# Altium PCB Driverkort.PcbDoc
Units mm, origin at the board's own origin, x right, y up, seen from the top; angles counter-clockwise.
Board outline 48 x 48 mm, 2 copper layers (Top Layer, Bottom Layer); 38 components, 61 nets, 157 pads, 27 vias.
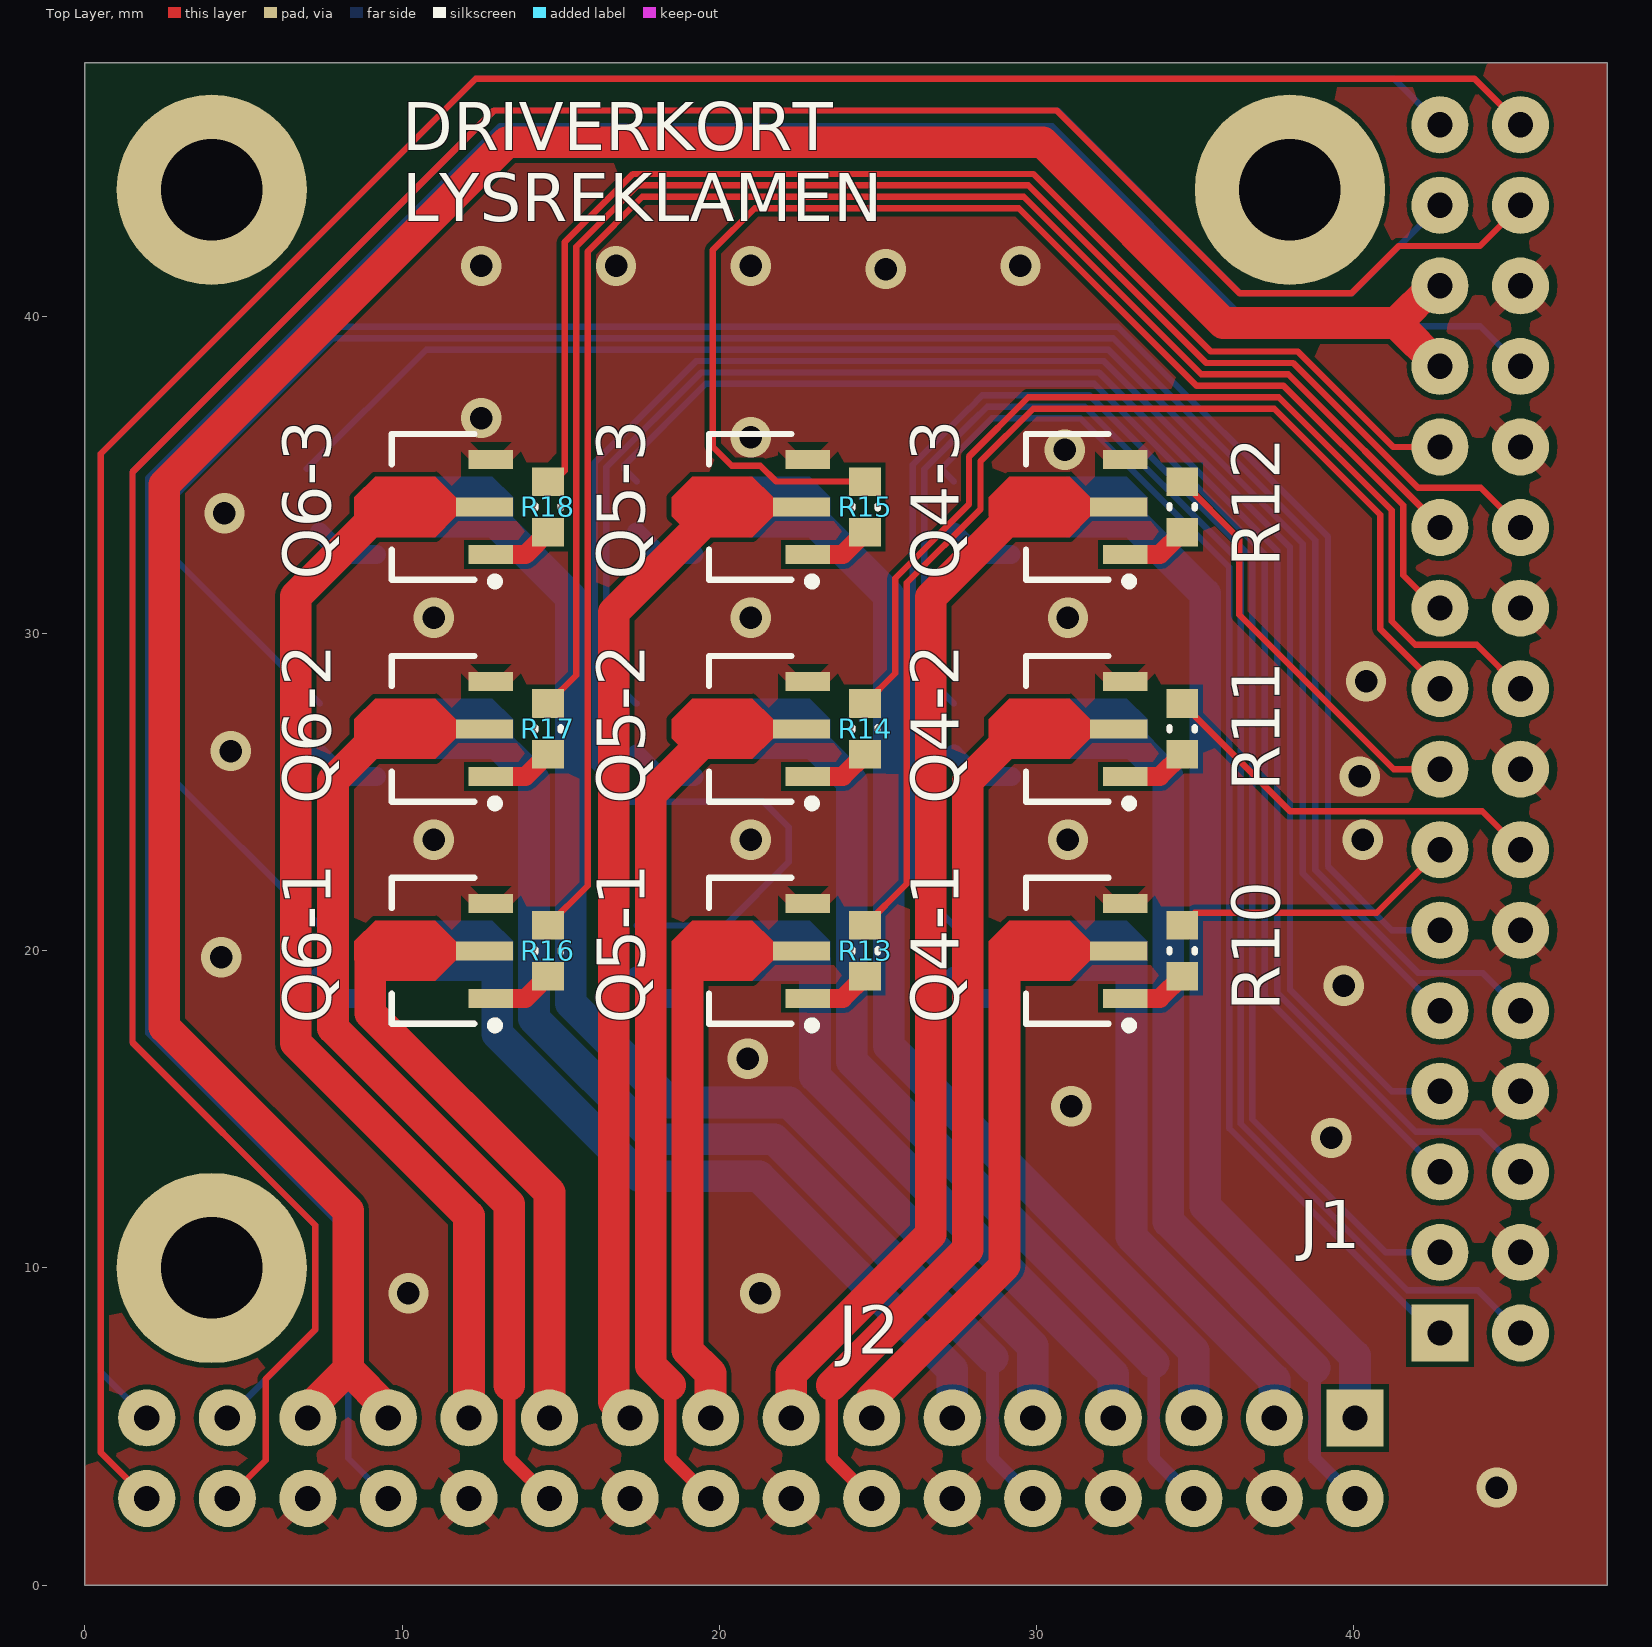
[diagram p0: Top Layer view]
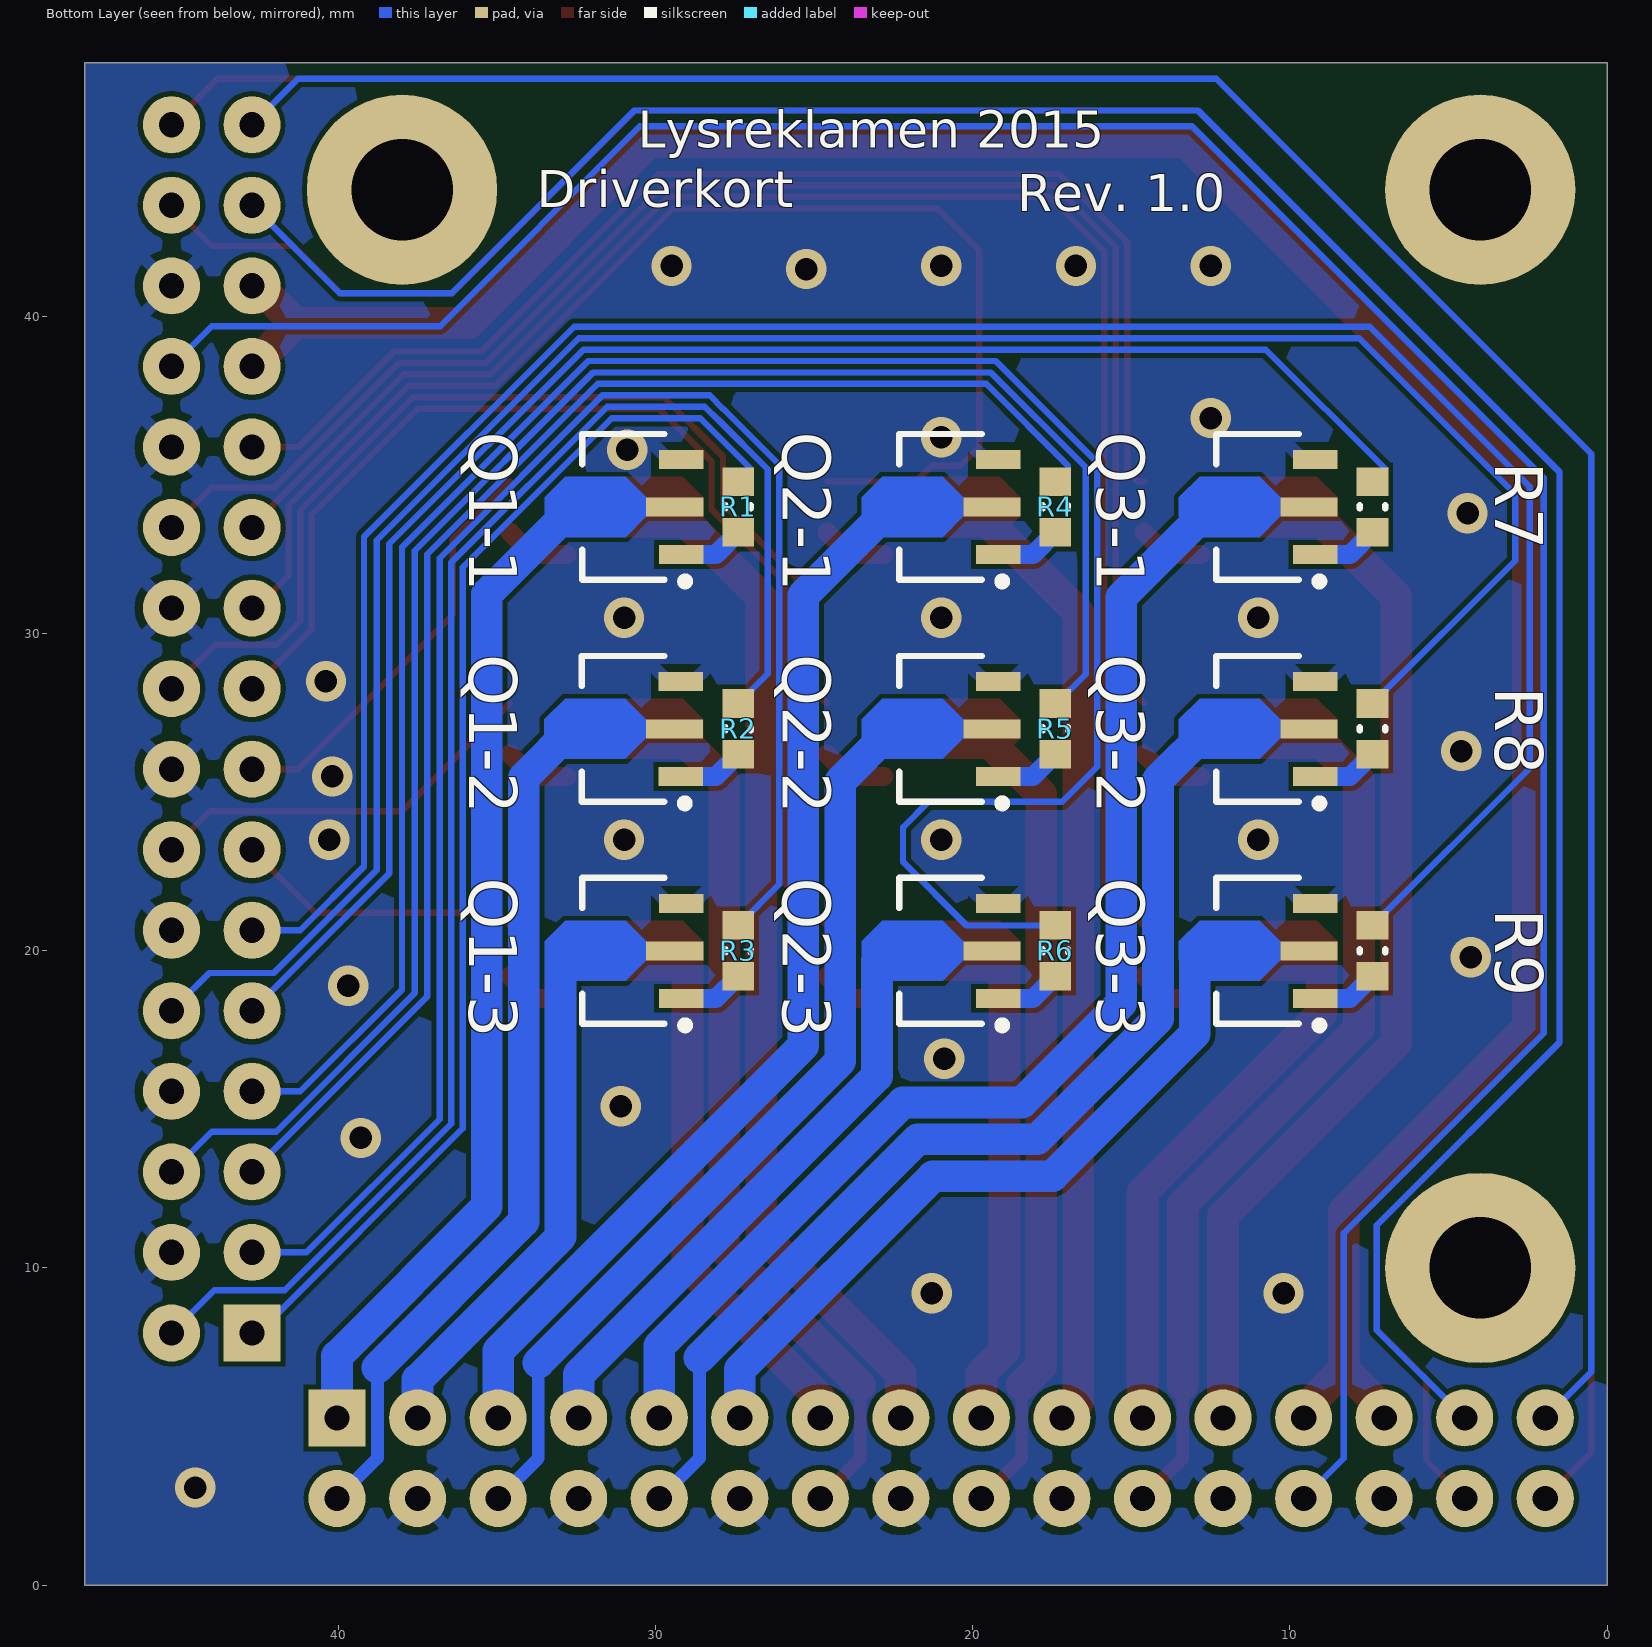
[diagram p1: Bottom Layer view, seen from below]

## Layer stack, top to bottom
Top Solder: solder mask 0.0102, Solder Resist, Dk 3.5
Top Layer: signal copper 0.0356
Dielectric 1: dielectric 0.32, FR-4, Dk 4.8
Bottom Layer: signal copper 0.0356
Bottom Solder: solder mask 0.0102, Solder Resist, Dk 3.5

## Board outline
0,0 0,48 48,48 48,0 0,0

## Design rules (kind name [scope] priority, off if disabled: settings)
Clearance [All] p1: gap=0.16 except(0: Arc-Text Track-Text SMDPad-Text THPad-Text Via-Text Fill-Text Poly-Text Region-Text Text-Text)
Height [All] p1: minheight=0 maxheight=200 prefheight=12.7
HoleSize [All] p1: absolutevalues=TRUE maxlimit=6.35 minlimit=0.3 maxpercent=80.000 minpercent=20.000
MinimumSolderMaskSliver [All] p1: minsoldermaskwidth=0.1
PlaneClearance [All] p1: clearance=1
PlaneConnect [All] p1: planeconnectstyle=Relief reliefexpansion=0.508 reliefentries=4 reliefconductorwidth=1 reliefairgap=0.254
PolygonConnect PolygonConnect_Via [All vs IsVia] p1: connectstyle=Direct reliefconductorwidth=0.254 reliefentries=4 polygonreliefangle="90 Angle" airgapwidth=0.254
PolygonConnect [All] p2: connectstyle=Relief reliefconductorwidth=0.4 reliefentries=4 polygonreliefangle="45 Angle" airgapwidth=0.254
RoutingVias [All] p1: holewidth=0.711 width=1.27 viastyle="Through Hole" minholewidth=0.711 minwidth=1.27 maxholewidth=0.711 maxwidth=1.27
SilkToSolderMaskClearance [IsPad] p1: minsilkscreentomaskgap=0.178 clearancetoexposedcopper=TRUE
SolderMaskExpansion [All] p1: expansion=0.102
Width [All] p1: maxlimit=10 minlimit=0.16 preferedwidth=0.4
24 further rules are at their usual default settings.

## Components (designator, comment, footprint, x,y, rotation, side; value= is the part's Value field where it differs from the comment)
J1 "Lysreklameparalellbusskontakt2015_FEMALE" HDRRAF32W64P254_2X16_4064X1260X600B 44,27 r180 top
J2 "Lysreklameparalellbusskontakt2015" HDRRA32W64P254_2X16_4064X1260X600B 21,4 r270 top
Q1-1 "2DD2679" SOT89-150P409X160-3N 31,34 r0 bottom
Q1-2 "2DD2679" SOT89-150P409X160-3N 31.011,27 r0 bottom
Q1-3 "2DD2679" SOT89-150P409X160-3N 31,20 r0 bottom
Q2-1 "2DD2679" SOT89-150P409X160-3N 21,34 r0 bottom
Q2-2 "2DD2679" SOT89-150P409X160-3N 21,27 r0 bottom
Q2-3 "2DD2679" SOT89-150P409X160-3N 21,20 r0 bottom
Q3-1 "2DD2679" SOT89-150P409X160-3N 11,34 r0 bottom
Q3-2 "2DD2679" SOT89-150P409X160-3N 11,27 r0 bottom
Q3-3 "2DD2679" SOT89-150P409X160-3N 11,20 r0 bottom
Q4-1 "2DD2679" SOT89-150P409X160-3N 31,20 r180 top
Q4-2 "2DD2679" SOT89-150P409X160-3N 31,27 r180 top
Q4-3 "2DD2679" SOT89-150P409X160-3N 31,34 r180 top
Q5-1 "2DD2679" SOT89-150P409X160-3N 21,20 r180 top
Q5-2 "2DD2679" SOT89-150P409X160-3N 21,27 r180 top
Q5-3 "2DD2679" SOT89-150P409X160-3N 21,34 r180 top
Q6-1 "2DD2679" SOT89-150P409X160-3N 11,20 r180 top
Q6-2 "2DD2679" SOT89-150P409X160-3N 11,27 r180 top
Q6-3 "2DD2679" SOT89-150P409X160-3N 11,34 r180 top
R1 "470R(0603)" RESC0603(1608)_N 27.4,34 r270 bottom
R2 "470R(0603)" RESC0603(1608)_N 27.4,27 r270 bottom
R3 "470R(0603)" RESC0603(1608)_N 27.4,20 r270 bottom
R4 "470R(0603)" RESC0603(1608)_N 17.4,34 r270 bottom
R5 "470R(0603)" RESC0603(1608)_N 17.4,27 r270 bottom
R6 "470R(0603)" RESC0603(1608)_N 17.4,20 r270 bottom
R7 "470R(0603)" RESC0603(1608)_N 7.4,34 r270 bottom
R8 "470R(0603)" RESC0603(1608)_N 7.4,27 r270 bottom
R9 "470R(0603)" RESC0603(1608)_N 7.4,20 r270 bottom
R10 "470R(0603)" RESC0603(1608)_N 34.6,20 r270 top
R11 "470R(0603)" RESC0603(1608)_N 34.6,27 r270 top
R12 "470R(0603)" RESC0603(1608)_N 34.6,34 r270 top
R13 "470R(0603)" RESC0603(1608)_N 24.6,20 r270 top
R14 "470R(0603)" RESC0603(1608)_N 24.6,27 r270 top
R15 "470R(0603)" RESC0603(1608)_N 24.6,34 r270 top
R16 "470R(0603)" RESC0603(1608)_N 14.6,20 r270 top
R17 "470R(0603)" RESC0603(1608)_N 14.6,27 r270 top
R18 "470R(0603)" RESC0603(1608)_N 14.6,34 r270 top

## Footprints (in the part's own frame and the unit in brackets; to place one, negate y for a bottom-side part, rotate by r counter-clockwise, add the part's x,y. Pads: shape width x height; smd on the part's side, far side on the other; paste and mask are expansions set on the pad)
HDRRA32W64P254_2X16_4064X1260X600B [mm] "Header Right Angle 2x16"
  rect 1.8x1.8 hole 0.8: 1(-1.27,19.05)
  round 1.8 hole 0.8: 2(1.27,19.05) 3(-1.27,16.51) 4(1.27,16.51) 5(-1.27,13.97) 6(1.27,13.97) 7(-1.27,11.43) 8(1.27,11.43) 9(-1.27,8.89) 10(1.27,8.89) 11(-1.27,6.35) 12(1.27,6.35) 13(-1.27,3.81) 14(1.27,3.81) 15(-1.27,1.27) 16(1.27,1.27) 17(-1.27,-1.27) 18(1.27,-1.27) 19(-1.27,-3.81) 20(1.27,-3.81) 21(-1.27,-6.35) 22(1.27,-6.35) 23(-1.27,-8.89) 24(1.27,-8.89) 25(-1.27,-11.43) 26(1.27,-11.43) 27(-1.27,-13.97) 28(1.27,-13.97) 29(-1.27,-16.51) 30(1.27,-16.51) 31(-1.27,-19.05) 32(1.27,-19.05)
  body extent -1.6,-20.12 11.03,20.12, height 5.79
HDRRAF32W64P254_2X16_4064X1260X600B [mm] "Header Right Angle 2x16 Female"
  rect 1.8x1.8 hole 0.8: 1(1.27,19.05)
  round 1.8 hole 0.8: 2(-1.27,19.05) 3(1.27,16.51) 4(-1.27,16.51) 5(1.27,13.97) 6(-1.27,13.97) 7(1.27,11.43) 8(-1.27,11.43) 9(1.27,8.89) 10(-1.27,8.89) 11(1.27,6.35) 12(-1.27,6.35) 13(1.27,3.81) 14(-1.27,3.81) 15(1.27,1.27) 16(-1.27,1.27) 17(1.27,-1.27) 18(-1.27,-1.27) 19(1.27,-3.81) 20(-1.27,-3.81) 21(1.27,-6.35) 22(-1.27,-6.35) 23(1.27,-8.89) 24(-1.27,-8.89) 25(1.27,-11.43) 26(-1.27,-11.43) 27(1.27,-13.97) 28(-1.27,-13.97) 29(1.27,-16.51) 30(-1.27,-16.51) 31(1.27,-19.05) 32(-1.27,-19.05)
  body extent -11.31,-20.57 1.47,20.57, height 5.02
RESC0603(1608)_N [mm] "Chip Resistor, Body 1.6x0.8mm, IPC Medium Density"
  rect 0.9x1 smd: 1(-0.8,0) 2(0.8,0)
  silkscreen extent -0.05,-0.4 0.05,0.4, body extent -0.85,-0.47 0.85,0.47, height 0.6
SOT89-150P409X160-3N [mm] "SOT89, 3-Leads, Body 4,50x2,50mm, Pitch 1,50mm, Lead Span 4,1mm, IPC Medium Density"
  rect 1.4x0.6 smd: 1(-1.8,1.5) 3(-1.8,-1.5)
  rect 1.8x0.6 smd: 2(-1.6,0)
  Top Layer region: -0.7,0.3 -0.05,0.95 1.85,0.95 2.5,0.3 2.5,-0.3 1.85,-0.95 -0.05,-0.95 -0.7,-0.3
  silkscreen extent -2.05,-2.3 1.32,2.47, body extent -1.28,-2.3 1.32,2.3, height 1.6

## Part data
Q1-1 Q1-2 Q1-3 Q2-1 Q2-2 Q2-3 Q3-1 Q3-2 Q3-3 Q4-1 Q4-2 Q4-3 Q5-1 Q5-2 Q5-3 Q6-1 Q6-2 Q6-3: "LOW VCE(SAT) NPN SURFACE MOUNT TRANSISTOR"
R1 R2 R3 R4 R5 R6 R7 R8 R9 R10 R11 R12 R13 R14 R15 R16 R17 R18: library part 3180, "470R 0603 0.1W 1% Thick film resistor"

## Free pads (board coordinates)
  round 6 hole 3.2 unplated: 0(4,10) 0(4,44) 0(38,44)

## Via types
v1: diameter 1.27, hole 0.711, Top Layer to Bottom Layer, 27 vias

## Nets (pads, with @x,y where several pads share a name; then routed paths per layer and width w, separated by ;. In a path a pad name is that pad's centre, name@x,y a point inside that pad or via, vN(x,y) a via of type N, cw(c..) or ccw(c..) an arc to the next point about the centre after c; other vN are vias at no path point)
BOKS_ID: J1.26 J2.26 | length 86.3
  Bottom Layer w0.2: J2.26 8.3,4 8.3,11.1 2,17.4 2,34.909 13.091,46 30.5,46 36.8,39.7 44,39.7 J1.26
DMX+: J1.29 J2.29 | length 82.8
  Bottom Layer w0.2: J2.29 7.26,8.04 7.26,11.35 1.5,17.11 1.5,35.1 12.9,46.5 30.675,46.5 36.435,40.74 39.96,40.74 J1.29
DMX+_RETUR: J1.31 J2.31 | length 78.7
  Bottom Layer w0.2: J2.31 0.5,6.72 0.5,35.675 12.325,47.5 41.28,47.5 J1.31
DMX-: J1.30 J2.30 | length 87.9
  Top Layer w0.2: J2.30 5.7,3.94 5.7,6.5 7.26,8.06 7.26,11.35 1.5,17.11 1.5,35.1 12.9,46.5 30.65,46.5 36.41,40.74 39.94,40.74 41.425,42.225 43.985,42.225 J1.30
DMX-_RETUR: J1.32 J2.32 | length 83.8
  Top Layer w0.2: J2.32 0.5,4.18 0.5,35.675 12.325,47.5 43.82,47.5 J1.32
GND: J1.4 J1.8 J1.12 J1.16 J1.20 J1.24 J1.28 J2.4 J2.8 J2.12 J2.16 J2.20 J2.24 J2.28 Q1-1.3 Q1-2.3 Q1-3.3 Q2-1.3 Q2-2.3 Q2-3.3 Q3-1.3 Q3-2.3 Q3-3.3 Q4-1.3 Q4-2.3 Q4-3.3 Q5-1.3 Q5-2.3 Q5-3.3 Q6-1.3 Q6-2.3 Q6-3.3
  other v1: 44.525,3.075 10.2,9.2 21.3,9.2 39.3,14.1 31.1,15.1 20.9,16.6 39.7,18.9 4.3,19.8 11,23.5 21,23.5 31,23.5 40.3,23.5 40.2,25.5 4.6,26.3 40.4,28.5 11,30.5 21,30.5 31,30.5 4.4,33.8 30.9,35.8 21,36.2 12.5,36.8 25.25,41.5 12.5,41.6 16.75,41.6 21,41.6 29.5,41.6
KANAL_1-1: J1.1 R1.1 | length 39.3
  Bottom Layer w0.2: R1.1 27,35.2 28.6,36.8 31.382,36.8 36.085,32.097 36.085,14.4 42.535,7.95 J1.1
KANAL_1-1_OUT: J2.1 Q1-1.2 | length 31.6
  Bottom Layer w1: 32.725,33.85 35.325,31.25 35.325,11.946 40.05,7.221 J2.1
KANAL_1-2: J1.2 R2.1 | length 49.9
  Bottom Layer w0.2: R2.1 26.465,28.735 26.465,35.183 28.022,36.74 28.031,36.74 28.451,37.16 31.531,37.16 36.445,32.246 36.445,14.549 41.694,9.3 43.92,9.3 J1.2
KANAL_1-2_OUT: J2.2 Q1-2.2 | length 27.7
  Bottom Layer w0.4: 38.775,6.8 38.775,4.005 J2.2
  Bottom Layer w1: 32.275,27.075 32.55,27.075 34.165,25.46 34.165,11.466 38.775,6.856
KANAL_1-3: J1.3 R3.1 | length 54.2
  Bottom Layer w0.2: R3.1 26.105,22.095 26.105,35.332 27.873,37.1 27.882,37.1 28.302,37.52 31.68,37.52 36.815,32.385 36.815,14.688 41.013,10.49 J1.3
KANAL_1-3_OUT: J2.3 Q1-3.2 | length 17.6
  Bottom Layer w1: 31.925,20.05 32.75,20.05 33,19.8 33,10.991 37.51,6.481 J2.3
KANAL_2-1: J1.5 R4.1 | length 45.9
  Bottom Layer w0.2: R4.1 17,35.2 17,35.3 19.58,37.88 31.829,37.88 37.2,32.509 37.2,18.56 J1.5
KANAL_2-1_OUT: J2.5 Q2-1.2 | length 34.4
  Bottom Layer w1: 22.025,34.075 22.475,34.075 25.345,31.205 25.345,17.005 34.97,7.38 J2.5
KANAL_2-2: J1.6 R5.1 | length 56.5
  Bottom Layer w0.2: R5.1 17.365,27.8 16.44,28.725 16.44,35.249 19.431,38.24 31.978,38.24 37.6,32.618 37.6,18.669 41.969,14.3 44,14.3 J1.6
KANAL_2-2_OUT: J2.6 Q2-2.2 | length 29.9
  Bottom Layer w0.4: 33.7,7.01 33.7,4 J2.6
  Bottom Layer w1: 22.05,26.95 22.575,26.95 24.185,25.34 24.185,16.525 33.7,7.01
KANAL_2-3: J1.7 R6.1 | length 68.9
  Bottom Layer w0.2: R6.1 20.2,20.8 22.2,22.8 22.2,23.9 21.4,24.7 17.18,24.7 16.08,25.8 16.08,35.398 19.282,38.6 32.127,38.6 38,32.727 38,18.778 41.208,15.57 J1.7
KANAL_2-3_OUT: J2.7 Q2-3.2 | length 19.3
  Bottom Layer w1: 22.175,20.025 22.3,19.9 22.825,19.9 23.025,19.7 23.025,16.044 32.43,6.639 J2.7
KANAL_3-1: J1.9 R7.1 | length 52
  Bottom Layer w0.2: R7.1@7,35.2 10.76,38.96 32.276,38.96 38.4,32.836 38.4,22.44 J1.9
KANAL_3-1_OUT: J2.9 Q3-1.2 | length 38.4
  Bottom Layer w1: 12.275,34.05 12.425,34.05 15.32,31.155 15.32,18.346 18.451,15.214 22.214,15.214 29.89,7.539 J2.9
KANAL_3-2: J1.10 R8.1 | length 67.7
  Bottom Layer w0.2: R8.1 2.9,32.3 2.9,34.4 7.82,39.32 32.426,39.32 38.8,32.946 38.8,22.549 42.049,19.3 44.08,19.3 J1.10
KANAL_3-2_OUT: J2.10 Q3-2.2 | length 34.1
  Bottom Layer w0.4: 28.62,7.168 28.62,4 J2.10
  Bottom Layer w1: 12.15,27.05 12.5,27.05 14.16,25.39 14.16,17.865 17.971,14.054 21.734,14.054 28.62,7.168
KANAL_3-3: J1.11 R9.1 | length 72.2
  Bottom Layer w0.2: R9.1 2.44,25.76 2.44,34.64 7.48,39.68 32.575,39.68 39.2,33.055 39.2,22.658 41.208,20.65 J1.11
KANAL_3-3_OUT: J2.11 Q3-3.2 | length 22.8
  Bottom Layer w1: 13,19.95 13,17.385 17.49,12.894 21.253,12.894 27.35,6.798 J2.11
KANAL_4-1: J1.13 R10.1 | length 9.1
  Top Layer w0.2: R10.1 35,21.2 40.74,21.2 J1.13
KANAL_4-1_OUT: J2.13 Q4-1.2 | length 17.6
  Top Layer w1: J2.13 24.81,5.885 29,10.075 29,20.025 30.1,20.025
KANAL_4-2: J1.14 R11.1 | length 12.6
  Top Layer w0.2: R11.1 38,24.4 44.06,24.4 J1.14
KANAL_4-2_OUT: J2.14 Q4-2.2 | length 27.8
  Top Layer w0.4: 23.55,6.3 23.55,3.99 J2.14
  Top Layer w1: 23.55,6.3 27.835,10.585 27.835,25.36 29.45,26.975 30.025,26.975
KANAL_4-3: J1.15 R12.1 | length 13.3
  Top Layer w0.2: R12.1 36.4,33 36.4,30.6 41.27,25.73 J1.15
KANAL_4-3_OUT: J2.15 Q4-3.2 | length 31.5
  Top Layer w1: J2.15 22.27,6.661 26.675,11.066 26.675,31.15 29.325,33.8
KANAL_5-1: J1.17 R13.1 | length 37.1
  Top Layer w0.2: R13.1 25.915,22.115 25.915,31.606 28.24,33.931 28.24,35.44 29.9,37.1 37.5,37.1 40.85,33.75 40.85,30.15 J1.17
KANAL_5-1_OUT: J2.17 Q5-1.2 | length 14.8
  Top Layer w1: 19,19.725 19,7.401 19.73,6.671 J2.17
KANAL_5-2: J1.18 R14.1 | length 33.2
  Top Layer w0.2: R14.1 25.555,28.755 25.555,31.755 27.88,34.08 27.88,35.589 29.751,37.46 37.649,37.46 41.21,33.899 41.21,30.39 41.95,29.65 43.89,29.65 J1.18
KANAL_5-2_OUT: J2.18 Q5-2.2 | length 26
  Top Layer w0.4: 18.46,6.3 18.46,4 J2.18
  Top Layer w1: 18.46,6.3 17.84,6.92 17.84,24.94 20,27.1
KANAL_5-3: J1.19 R15.1 | length 41.4
  Top Layer w0.2: R15.1 21.8,34.8 21.3,35.3 20.4,35.3 19.8,35.9 19.8,42.1 21.12,43.42 29.453,43.42 35.053,37.82 37.798,37.82 41.57,34.048 41.57,31.848 42.608,30.81 J1.19
KANAL_5-3_OUT: J2.19 Q5-3.2 | length 30.3
  Top Layer w1: J2.19 16.68,5.78 16.68,30.68 20,34
KANAL_6-1: J1.21 R16.1 | length 53.7
  Top Layer w0.2: R16.1 15.855,22.055 15.855,42.055 17.58,43.78 29.602,43.78 35.202,38.18 37.947,38.18 42.73,33.397 J1.21
KANAL_6-1_OUT: J2.21 Q6-1.2 | length 18.1
  Top Layer w1: 10,20 9,20 9,18.031 14.65,12.381 J2.21
KANAL_6-2: J1.22 R17.1 | length 49.8
  Top Layer w0.2: R17.1 15.495,28.695 15.495,42.204 17.431,44.14 29.751,44.14 35.351,38.54 38.096,38.54 42.036,34.6 44.02,34.6 J1.22
KANAL_6-2_OUT: J2.22 Q6-2.2 | length 28.3
  Top Layer w0.4: 13.38,6.3 13.38,4 J2.22
  Top Layer w1: 10,27 9.45,27 7.825,25.375 7.825,17.566 13.38,12.011 13.38,6.3
KANAL_6-3: J1.23 R18.1 | length 39.9
  Top Layer w0.2: R18.1 14.8,34.8 15.135,35.135 15.135,42.353 17.282,44.5 29.9,44.5 35.5,38.9 38.246,38.9 41.256,35.89 J1.23
KANAL_6-3_OUT: J2.23 Q6-3.2 | length 32.7
  Top Layer w1: 10,34 9.475,34 6.65,31.175 6.65,17.1 12.11,11.64 J2.23
NetQ1-1_1: Q1-1.1 R1.2 | length 2.1
  Bottom Layer w0.6: R1.2 28.1,32.5 Q1-1.1
NetQ1-2_1: Q1-2.1 R2.2 | length 2.1
  Bottom Layer w0.6: R2.2 28.1,25.5 Q1-2.1
NetQ1-3_1: Q1-3.1 R3.2 | length 2.1
  Bottom Layer w0.6: R3.2 28.1,18.5 Q1-3.1
NetQ2-1_1: Q2-1.1 R4.2 | length 2.1
  Bottom Layer w0.6: R4.2 18.1,32.5 Q2-1.1
NetQ2-2_1: Q2-2.1 R5.2 | length 2.1
  Bottom Layer w0.6: R5.2 18.1,25.5 Q2-2.1
NetQ2-3_1: Q2-3.1 R6.2 | length 2.1
  Bottom Layer w0.6: R6.2 18.1,18.5 Q2-3.1
NetQ3-1_1: Q3-1.1 R7.2 | length 2.1
  Bottom Layer w0.6: R7.2 8.1,32.5 Q3-1.1
NetQ3-2_1: Q3-2.1 R8.2 | length 2.1
  Bottom Layer w0.6: R8.2 8.1,25.5 Q3-2.1
NetQ3-3_1: Q3-3.1 R9.2 | length 2.1
  Bottom Layer w0.6: R9.2 8.1,18.5 Q3-3.1
NetQ4-1_1: Q4-1.1 R10.2 | length 2.1
  Top Layer w0.6: Q4-1.1 33.9,18.5 R10.2
NetQ4-2_1: Q4-2.1 R11.2 | length 2.1
  Top Layer w0.6: Q4-2.1 33.9,25.5 R11.2
NetQ4-3_1: Q4-3.1 R12.2 | length 2.1
  Top Layer w0.6: Q4-3.1 33.9,32.5 R12.2
NetQ5-1_1: Q5-1.1 R13.2 | length 2.1
  Top Layer w0.6: Q5-1.1 23.9,18.5 R13.2
NetQ5-2_1: Q5-2.1 R14.2 | length 2.1
  Top Layer w0.6: Q5-2.1 23.9,25.5 R14.2
NetQ5-3_1: Q5-3.1 R15.2 | length 2.1
  Top Layer w0.6: Q5-3.1 23.9,32.5 R15.2
NetQ6-1_1: Q6-1.1 R16.2 | length 2.1
  Top Layer w0.6: Q6-1.1 13.9,18.5 R16.2
NetQ6-2_1: Q6-2.1 R17.2 | length 2.1
  Top Layer w0.6: Q6-2.1 13.9,25.5 R17.2
NetQ6-3_1: Q6-3.1 R18.2 | length 2.1
  Top Layer w0.6: Q6-3.1 13.9,32.5 R18.2
VCC_P5V0: J1.25 J1.27 J2.25 J2.27 | length 83.9
  Top Layer w1: J2.27 7.03,5.53 8.3,6.8 ; J2.25 9.57,5.53 8.3,6.8 ; J1.25 41.36,39.8 ; J1.27 42.53,40.97 41.36,39.8 ; 8.3,6.8 8.3,11.8 2.5,17.6 2.5,34.7 13.3,45.5 30.2,45.5 35.9,39.8 41.36,39.8

## Polygon pours and split planes (outlines as drawn)
GND on Top Layer "GND_TOP" (solid, remove dead copper, pour order 4): 0,0 0,48 48,48 48,0 0,0
GND on Bottom Layer "GND_BOT" (solid, remove dead copper, pour order 3): 0,0 0,48 48,48 48,0 0,0

## Silkscreen, mask and mechanical layers (free items; w line width, h text height)
Top Overlay:
  text "DRIVERKORT" at 10,45.25 h1.52
  text "LYSREKLAMEN" at 10,43 h1.52
Bottom Overlay:
  text "Lysreklamen 2015" at 30.575,44.925 h2
  text "Driverkort" at 33.75,43.05 h2
  text "Rev. 1.0" at 18.6,42.925 h2